# Altium PCB PA_Channel_RF1.PcbDoc (part 1 of 2)
Units mm, origin at the board's own origin, x right, y up, seen from the top; angles counter-clockwise.
Board outline 79.99 x 29.49 mm, 2 copper layers (Top Layer, Bottom Layer), stack 1.071 mm thick; 66 components, 88 nets, 184 pads, 409 vias.
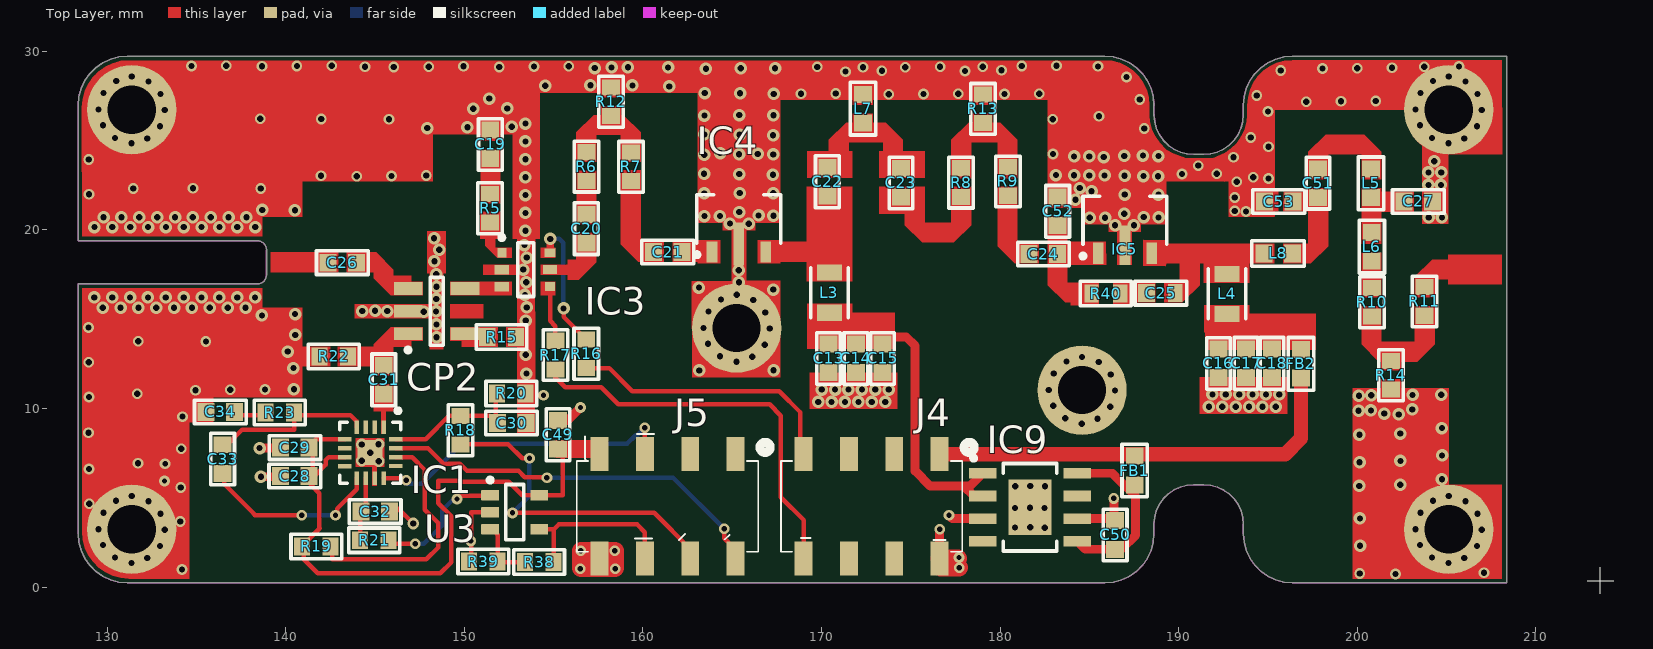
[diagram p0: Top Layer view]
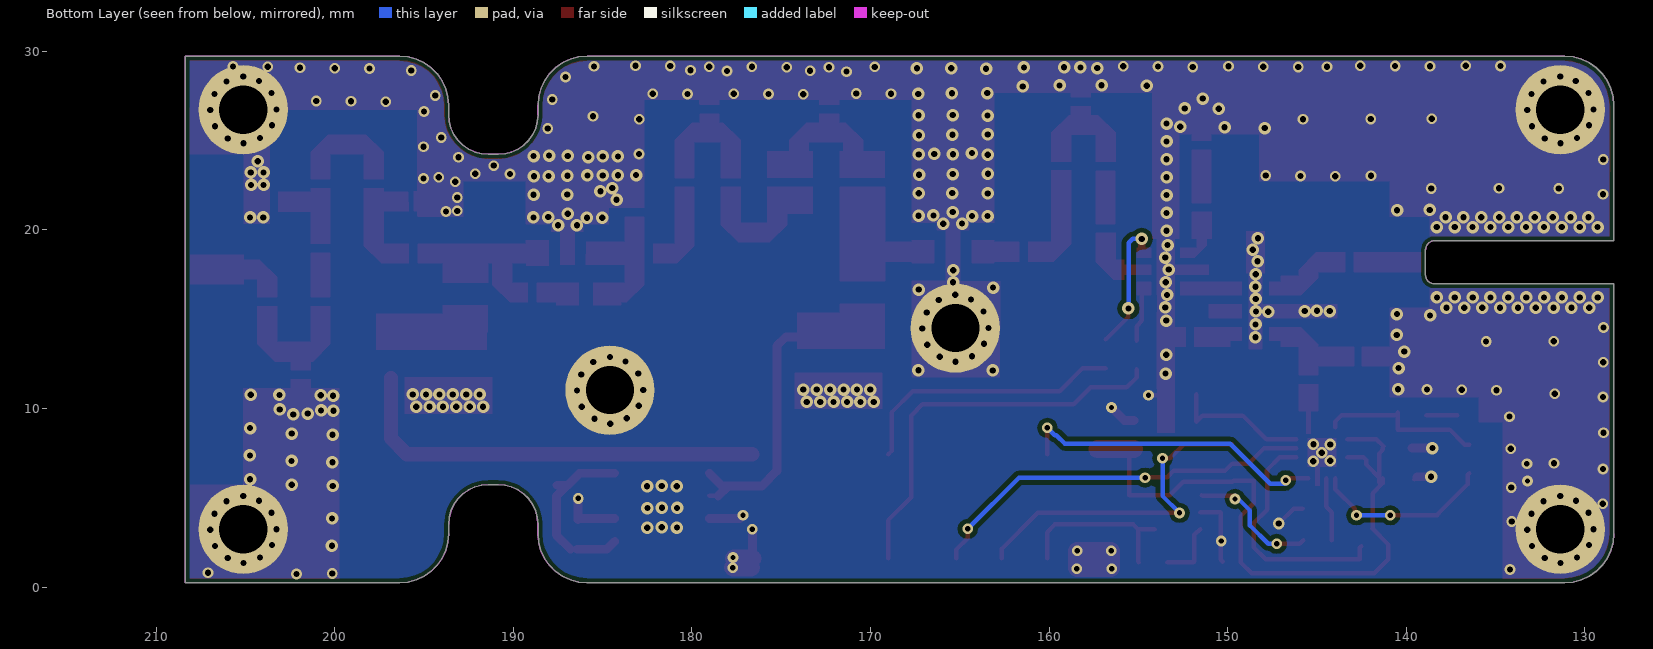
[diagram p1: Bottom Layer view, seen from below]
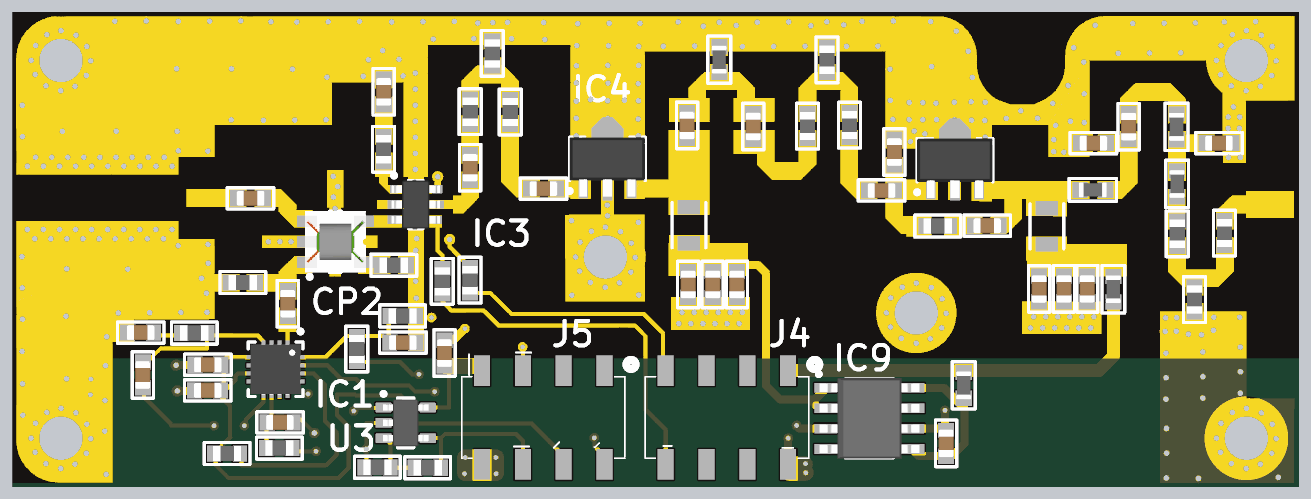
[diagram p3: 3D render of the assembled board from above, using the file's embedded part models]

## Layer stack, top to bottom
Top Solder: solder mask 0.0102, Solder Resist, Dk 3.5
Top Layer: signal copper 0.0356
Dielectric1: core 1, FR-4, Dk 4.8
Bottom Layer: signal copper 0.0356
Bottom Solder: solder mask 0.0102, Solder Resist, Dk 3.5

## Board outline
364 vertices, not listed, extent 128.38,0.235 208.37,29.725

## Design rules (kind name [scope] priority, off if disabled: settings)
Clearance Clearance_1 [InNamedPolygon('L3-No Net')] p1: gap=0.254
Clearance [All] p2: gap=0.152
HoleSize [All] p1: absolutevalues=TRUE maxlimit=5 minlimit=0.2 maxpercent=80.000 minpercent=20.000
HoleToHoleClearance [All] p1: gap=0.2 allowstackedmicrovias=TRUE
MinimumSolderMaskSliver [All] p1: minsoldermaskwidth=0
PolygonConnect [All] p1: connectstyle=Direct reliefconductorwidth=0.254 reliefentries=4 polygonreliefangle="90 Angle" airgapwidth=0.254
RoutingVias [All] p1: holewidth=0.711 width=1.27 viastyle="Through Hole" minholewidth=0.2 minwidth=0.5 maxholewidth=0.711 maxwidth=1.27
SilkToSolderMaskClearance [IsPad] p1: minsilkscreentomaskgap=0 clearancetoexposedcopper=TRUE
SolderMaskExpansion [All] p1: expansion=0.102
Width [All] p1: maxlimit=2 minlimit=0.152 preferedwidth=0.254
26 further rules are at their usual default settings.

## Classes and differential pairs
component class U_Power_Stage: C16 C23 C24 C34 IC3 IC4 R15 R16 R18
component class U_Preamp_protection: C13 C14 C15 C16 C17 C18 C19 C20 C21 C22 C23 C24 C25 C26 C27 C28 C29 C31 C32 C33 C34 C49 C50 C51 C52 C53 CP2 FB1 FB2 IC1 IC3 IC4 IC5 J4 L3 L4 L5 L6 L7 L8 R5 R6 R7 R8 R9 R10 R11 R12 R13 R14 R15 R16 R17 R18 R19 R21 R22 R23 R38 R39 R40 U3

## Components (designator, comment, footprint, x,y, rotation, side; value= is the part's Value field where it differs from the comment)
C13 "4.7u" 0603C#1 170.4,12.8 r270 top
C14 "1n" 0603C#1 171.925,12.8 r270 top
C15 "10n" 0603C#1 173.425,12.8 r270 top
C16 "4.7u" 0603C#1 192.233,12.521 r270 top
C17 "1n" 0603C#1 193.775,12.525 r270 top
C18 "10n" 0603C#1 195.225,12.525 r270 top
C19 "680p" 0603C#1 151.457,24.784 r90 top
C20 "680p" 0603C#1 156.833,20.065 r90 top
C21 "680p" 0603C#1 161.392,18.757 r0 top
C22 "56p" 0603C#1 170.33,22.694 r90 top
C23 "220p" 0603C#1 174.448,22.628 r270 top
C24 "680p" 0603C#1 182.43,18.648 r0 top
C25 "10n" 0603C#2 189.005,16.456 r0 top
C26 "680p" 0603C#1 143.168,18.16 r0 top
C27 "5.6p" 0603C#1 203.422,21.589 r180 top
C28 "100n" 0603C#1 140.508,6.209 r180 top
C29 "100p" 0603C#1 140.516,7.804 r180 top
C30 "100n" 0603C#1 152.647,9.184 r180 top
C31 "470n" 0603C#1 145.488,11.602 r270 top
C32 "100n" 0603C#1 145.005,4.22 r180 top
C33 "100n" 0603C#1 136.468,7.167 r90 top
C34 "100n" 0603C#1 136.339,9.804 r180 top
C49 "100n" 0603C#1 155.242,8.529 r270 top
C50 "4.7u" 0603C#1 186.448,2.913 r90 top
C51 "1nF" 0603C#1 197.799,22.615 r270 top
C52 "1p" 0603C#1 183.228,21.036 r270 top
C53 "6.8pF" 0603C#1 195.607,21.588 r0 top
CP2 "20dB" XFMR_MINI-CIRCUITS_AT224 148.45,15.45 r90 top
FB1 "100R/1A" 0603L 187.541,6.524 r90 top
FB2 "100R/1A" 0603L 196.85,12.5 r270 top
IC1 "HMC7832" QFN50P300X300X80_HS-17N 144.73,7.521 r270 top
IC3 "BBWA5673" SOT95P280X130-6N 153.45,17.77 r0 top
IC4 "MMA3128" SOT89-150P410X170-3N#1 165.375,20.61 r90 top
IC5 "MMA1H22" SOT89-150P410X170-3N#2 186.995,20.534 r90 top
IC9 "ADP7102ARDZ-5.0-R7" SOIC127P600X175-9N-R241X309 181.674,4.465 r0 top
J4 "ZL264-8DG" ZL264-8DG 172.81,4.52 r180 top
J5 "ZL264-8DG" ZL264-8DG 161.38,4.52 r180 top
L3 "1uH" INDP2520X18L 170.449,16.483 r90 top
L4 "1uH" INDP2520X18L 192.718,16.413 r90 top
L5 "33nH" 0603L 200.781,22.605 r270 top
L6 "33nH" 0603L 200.817,19.056 r270 top
L7 "330nH" 0603L 172.334,26.783 r90 top
L8 "18nH" 0603L 195.571,18.684 r0 top
R5 "49R9" 0603R#1 151.449,21.208 r270 top
R6 "8.06" 0603R#1 156.833,23.545 r270 top
R7 "8.06" 0603R#1 159.325,23.525 r90 top
R8 "24" 0603R#1 177.822,22.65 r270 top
R9 "24" 0603R#1 180.439,22.709 r90 top
R10 "8.06" 0603R#1 200.825,15.951 r90 top
R11 "8.06" 0603R#1 203.761,15.99 r270 top
R12 "147R" 0603R#1 158.208,27.171 r270 top
R13 "36.5" 0603R#1 179.038,26.775 r90 top
R14 "140" 0603R#1 201.893,11.858 r270 top
R15 "49R9" 0603R#1 152.084,13.994 r0 top
R16 "100R" 0603R#1 156.829,13.063 r270 top
R17 "100R" 0603R#1 155.102,12.992 r270 top
R18 "4k7" 0603R#1 149.783,8.782 r90 top
R19 "10k" 0603R#1 141.715,2.278 r0 top
R20 "10k" 0603R#1 152.635,10.842 r180 top
R21 "4k7" 0603R#1 144.962,2.617 r180 top
R22 "24.9" 0603R#1 142.688,12.916 r180 top
R23 "4R02" 0603R#1 139.67,9.772 r180 top
R38 "10k" 0603R#1 154.192,1.396 r180 top
R39 "10k" 0603R#1 151.068,1.421 r180 top
R40 "470" 0603R#2 185.924,16.431 r180 top
U3 "LMV321M5X" DBV0005A_N 152.82,4.19 r0 top

## Footprints (in the part's own frame and the unit in brackets; to place one, negate y for a bottom-side part, rotate by r counter-clockwise, add the part's x,y. Pads: shape width x height; smd on the part's side, far side on the other; paste and mask are expansions set on the pad)
0603C#1 [mm]
  rect 0.95x1 smd: 1(-0.8,0) 2(0.8,0)
  silkscreen extent -1.45,-0.66 1.45,0.66, body extent -0.87,-0.47 0.88,0.48, height 0.87
0603C#2 [mm]
  rect 0.95x1 smd: 1(-0.8,0)
  rect 0.8x1 smd: 2(0.8,0)
  silkscreen extent -1.45,-0.66 1.45,0.66, body extent -0.87,-0.47 0.88,0.48, height 0.87
0603L [mm]
  rect 0.95x1 smd: 1(-0.8,0) 2(0.8,0)
  silkscreen extent -1.47,-0.71 1.47,0.71, body extent -0.87,-0.47 0.88,0.48, height 0.7
0603R#1 [mm]
  rect 0.9x1 smd: 1(-0.8,0) 2(0.8,0)
  silkscreen extent -1.42,-0.69 1.42,0.69, body extent -0.87,-0.47 0.88,0.48, height 0.55
0603R#2 [mm]
  rect 0.8x1 smd: 1(-0.8,0) 2(0.8,0)
  silkscreen extent -1.42,-0.69 1.42,0.69, body extent -0.87,-0.47 0.88,0.48, height 0.55
DBV0005A_N [mm] "SOT23, 5-Leads, Body 3.05x1.75mm, Pitch 0.95mm, IPC Medium Density"
  rrect17% 1x0.6 smd: 1(-1.375,0.95) 2(-1.375,0) 3(-1.375,-0.95) 4(1.375,-0.95) 5(1.375,0.95)
  silkscreen extent -1.5,-1.55 0.5,1.92, body extent -1.42,-1.46 1.42,1.46, height 1.08
INDP2520X18L [mm] "Precision Wire Wound Inductor, 2-Leads, Body 2.5x2.0mm, IPC High Density"
  rect 0.9x1.4 smd: 1(-1.125,0) 2(1.125,0)
  silkscreen extent -1.4,-1.05 1.4,1.05, body extent -1.35,-1.05 1.35,1.05, height 1.8
QFN50P300X300X80_HS-17N [mm] "QFN, 16-Leads, Body 3.00x3.00mm, Pitch 0.50mm, Thermal Pad 1.60x1.60mm, IPC Medium Density"
  rect 0.75x0.25 smd: 1(-1.425,0.75) 3(-1.425,-0.25) 10(1.425,-0.25) 12(1.425,0.75)
  rect 0.75x0.24 smd: 2(-1.425,0.25) 4(-1.425,-0.75) 9(1.425,-0.75) 11(1.425,0.25)
  rect 0.25x0.75 smd: 5(-0.75,-1.425) 6(-0.25,-1.425) 7(0.25,-1.425) 8(0.75,-1.425) 14(0.25,1.425) 15(-0.25,1.425) 16(-0.75,1.425)
  rect 0.24x0.75 smd: 13(0.75,1.425)
  rect 1.4x1.4 smd: 17(0,0)
  silkscreen extent -2.47,-1.7 1.7,1.7, body extent -1.58,-1.58 1.58,1.58, height 0.8
SOIC127P600X175-9N-R241X309 [mm] "SOIC 8, Pitch 1.27mm - Body 3.9x4.9mm, (w/thermal tab 2.41mm X 3.098mm), IPC Medium Density"
  rect 1.55x0.6 smd: 1(-2.65,1.905) 2(-2.65,0.635) 3(-2.65,-0.635) 4(-2.65,-1.905) 5(2.65,-1.905) 6(2.65,-0.635) 7(2.65,0.635) 8(2.65,1.905)
  rect 2.41x3.098 smd: 9(0,0)
  silkscreen extent -3.27,-2.45 1.5,2.87, body extent -3.1,-2.5 3.1,2.5, height 1.75
SOT89-150P410X170-3N#1 [mm] "SOT89, 3-Leads, Body 4.55x2.55mm, Pitch 1.50mm, Lead Span 4.1mm, IPC Medium Density"
  rect 1.2x0.6 smd: 1(-1.85,1.5) 3(-1.85,-1.5)
  rect 2.4x0.6 smd: 2(-1.4,0)
  Top Layer region: -0.2,0.3 0.5,1 1.9,1 2.6,0.3 2.6,-0.3 1.9,-1 0.5,-1 -0.2,-0.3
  silkscreen extent -2.12,-2.35 1.35,2.47, body extent -2.35,-2.35 1.35,2.35, height 1.7
SOT89-150P410X170-3N#2 [mm] "SOT89, 3-Leads, Body 4.55x2.55mm, Pitch 1.50mm, Lead Span 4.1mm, IPC Medium Density"
  rect 1.2x0.6 smd: 1(-1.85,1.5) 3(-1.85,-1.5)
  rect 2.2x0.6 smd: 2(-1.4,0)
  Top Layer region: -0.2,0.3 0.5,1 1.9,1 2.6,0.3 2.6,-0.3 1.9,-1 0.5,-1 -0.2,-0.3
  silkscreen extent -2.12,-2.35 1.35,2.47, body extent -2.35,-2.35 1.35,2.35, height 1.7
SOT95P280X130-6N [mm] "SOT23, 6-Leads, Body 2.90x2.80mm, Pitch 0.95mm, IPC Medium Density"
  rect 0.5x0.52 smd: 1(-1.35,0.95)
  rect 0.8x0.55 smd: 2(-1.35,0)
  rect 0.8x0.54 smd: 3(-1.35,-0.95)
  rect 0.55x0.5 smd: 4(1.35,-0.95)
  rect 0.8x0.5 smd: 5(1.35,0)
  rect 0.6x0.5 smd: 6(1.35,0.95)
  silkscreen extent -1.47,-1.5 0.45,1.92, body extent -1.5,-1.5 1.5,1.5, height 1.3
XFMR_MINI-CIRCUITS_AT224 [mil] "MINI-CIRCUITS RF Transformer, Case AT224 - Body 3.81X3.81mm"
  rect 28x63 smd: 1(-50,62.6) 2(0,62.6) 3(50,62.6) 4(50,-62.6) 6(-50,-62.6)
  silkscreen extent -91,-14 75,68, body extent -75,-75 75,75, height 150
ZL264-8DG [mm]
  rect 1x1.9 smd: 1(-3.81,-2.921) 2(-3.81,2.921) 3(-1.27,-2.921) 4(-1.27,2.921) 5(1.27,-2.921) 6(1.27,2.921) 7(3.81,-2.921) 8(3.81,2.921)
  silkscreen extent -5.74,-3.59 5.08,2.54, body extent -5.08,-3.56 5.08,3.56, height 7.5

## Part data
C13 C14 C15 C16 C17 C18 C19 C20 C21 C22 C23 C24 C25 C26 C27 C28 C29 C30 C31 C32 C33 C34 C49 C50 C51 C52 C53: library part CAP_SMD_0603, "Capacitor SMD"
CP2: "50 Ohms directional coupler"
FB1 FB2: library part L_FERRITE_BEAD_0603, "ferrite bead 100R@100MHz 1A"
IC1: library part ADL5904, "DC   to 6 GHz  , 45 dB DC  to 6 GHz , 45 dB TruPwr Detector with Envelope Threshold Detection"
IC3: library part RF_HMC544AE
IC4: library part RF_MMG3012N, "Broadband High Linearity Amplifier"
IC5: library part RF_MMG3H21N, "Broadband High Linearity Amplifier"
IC9: "300 mA, Low Noise, CMOS LDO Linear Regulator"
J4 J5: library part "CON_2X4 2.54 SMT FEM", "2.54mm pitch connector"
L3 L4: "100uH, 60mA, 21R"
L5 L6 L7 L8: library part L_0603_1uH, "1uH, 25mA, 0.6R"
R5 R6 R7 R8 R9 R10 R11 R12 R13 R14 R15 R16 R17 R18 R19 R20 R21 R22 R23 R38 R39 R40: library part RES_0603, "SMD Resistor"
U3: library part CMP-0055-01048-3, "General Purpose, Low Voltage, Rail-to-Rail Output Operational Amplifiers, 5-pin SOT-23"

## Free pads (board coordinates)
  round 5 hole 2.7 unplated: 6(131.376,3.23) 6(131.378,26.73) 6(165.25,14.5) 6(205.125,3.23) 6(205.125,26.73) 8(184.591,11.025)

## Via types
v1: diameter 0.7, hole 0.35, Top Layer to Bottom Layer, tented both sides, 286 vias
v2: diameter 0.6, hole 0.35, Top Layer to Bottom Layer, tented both sides, 93 vias
v3: diameter 0.6, hole 0.3, Top Layer to Bottom Layer, tented both sides, 24 vias
v4: diameter 0.65, hole 0.35, Top Layer to Bottom Layer, tented both sides, 6 vias

## Nets (pads, with @x,y where several pads share a name; then routed paths per layer and width w, separated by ;. In a path a pad name is that pad's centre, name@x,y a point inside that pad or via, vN(x,y) a via of type N, cw(c..) or ccw(c..) an arc to the next point about the centre after c; other vN are vias at no path point)
ADL_Q: IC1.12 J5.5 | length 17.4
  Top Layer w0.254: IC1.12@145.48,6.096 146.635,6.096 v3(146.745,5.986) ; v3(160.097,8.912) 160.11,8.899 J5.5@160.11,7.441
  Bottom Layer w0.254: v3@146.739,5.788 147.62,5.788 149.849,8.017 159.114,8.017 159.596,8.499 159.684,8.499 v3(160.097,8.912)
ALERT: 
FR_Q: 
FR_RST: 
FR_VREF: 
FRPWR: 
GND: C13.2 C14.2 C15.2 C16.2 C17.2 C18.2 C19.2 C27.1 C28.2 C29.2 C30.1 C32.1 C34.2 C49.1 C50.2 C52.1 C53.1 CP2.2 IC1.11 IC1.17 IC3.2 IC4.2 IC5.2 IC9.3 IC9.6 IC9.9 J4.2 J5.8 L7.2 pad.6 pad.8 R12.1 R13.2 R14.2 R15.2 R20.1 R22.2 R39.2 U3.2 | length 28.9
  Top Layer w0.254: v2(134.219,9.543) 134.497,9.82 ; C28.2@139.41,6.175 C28.2@139.553,6.032 ; C29.2@139.682,7.778 C29.2@139.74,7.836 ; IC1.11@144.98,6.096 144.98,6.826 v4(145.204,7.05) ; C32.1@145.805,4.389 146.311,4.389 v4(147.143,3.557) ; R39.2@150.268,1.421 150.381,1.535 v3@150.381,2.54 ; v3@150.343,2.54 150.392,2.59 150.392,4.19 U3.2@151.445,4.19 U3.2@151.545,4.19 ; C30.1@153.436,9.234 153.436,10.739 v3(154.435,10.739) ; v3@177.649,1.599 v3(177.7,1.65) ; C50.2@186.331,3.83 C50.2@186.375,3.786
  Top Layer w0.5: v1(138.538,7.778) C29.2@139.682,7.778 ; v1(138.615,6.175) C28.2@139.41,6.175 ; C49.1@155.242,9.329 155.783,9.329 v3(156.505,10.051) ; J4.2@176.62,1.599 v3(176.62,3.23) ; v3(177.14,4.023) 177.333,3.83 IC9.3@179.024,3.83 ; IC9.6@184.324,3.83 C50.2@186.331,3.83 ; C50.2@186.375,3.786 v3(186.375,4.961)
  Top Layer w1: 134.497,9.82 C34.2@135.336,9.82 ; J4.2@176.62,1.599 v3@177.649,1.599 ; J4.2@176.681,1.085 v3(177.71,1.085) ; v3@156.526,1.069 v3(156.526,2.033) v3(158.431,2.033) 158.431,1.069 v3@156.526,1.069
  other v1: 131.366,1.349 205.115,1.349 132.248,1.623 205.998,1.623 130.442,1.651 204.191,1.651 132.955,2.296 206.704,2.296 200.163,2.305 129.768,2.357 203.517,2.357 133.229,3.205 206.979,3.205 129.515,3.234 203.265,3.234 180.842,3.328 181.688,3.343 182.503,3.324 200.156,3.842 132.983,4.103 206.732,4.103 129.796,4.164 203.546,4.164 180.833,4.427 182.494,4.423 181.679,4.442 132.309,4.809 206.059,4.809 130.503,4.838 204.252,4.838 131.379,5.09 205.129,5.09 180.851,5.644 182.512,5.64 181.697,5.659 200.121,5.662 202.417,5.729 204.745,6.037 200.13,6.993 202.425,7.06 204.754,7.368 200.123,8.529 202.418,8.596 204.747,8.904 184.582,9.143 185.464,9.418 183.657,9.446 202.334,9.666 201.521,9.711 200.076,9.873 200.77,9.888 203.079,9.942 186.17,10.091 191.696,10.089 192.446,10.089 193.196,10.089 193.946,10.089 194.696,10.089 195.446,10.089 182.983,10.152 169.818,10.361 170.568,10.361 171.318,10.361 172.068,10.361 172.818,10.361 173.568,10.361 200.096,10.716 200.789,10.732 203.102,10.758 204.706,10.76 191.892,10.783 192.642,10.783 193.392,10.783 194.142,10.783 194.892,10.783 195.642,10.783 186.445,11 182.731,11.029 170.014,11.055 170.764,11.055 171.514,11.055 172.264,11.055 173.014,11.055 173.764,11.055 140.463,11.069 186.198,11.898 153.478,11.951 183.012,11.959 163.159,12.129 167.321,12.139 140.429,12.261 185.525,12.604 165.24,12.619 183.718,12.633 166.123,12.893 184.595,12.885 164.316,12.921 153.441,13.001 140.12,13.183 166.829,13.566 163.642,13.627 148.449,13.988 140.536,14.116 167.104,14.475 163.39,14.504 148.442,14.705 153.446,14.919 138.67,15.211 140.523,15.288 166.857,15.373 147.731,15.42 148.421,15.429 163.671,15.434 144.281,15.455 145.69,15.456 145,15.464 129.75,15.639 130.75,15.639 131.75,15.639 132.75,15.639 133.75,15.639 134.75,15.639 135.75,15.639 136.75,15.639 137.75,15.639 153.502,15.655 166.184,16.079 164.377,16.108 148.422,16.13 129.284,16.217 130.284,16.217 131.284,16.217 132.284,16.217 133.284,16.217 134.284,16.217 135.284,16.217 136.284,16.217 137.284,16.217 138.284,16.217 153.397,16.358 165.254,16.36 167.299,16.66 163.141,16.77 148.446,16.82 153.469,17.07 165.379,17.069 148.429,17.521 165.363,17.737 153.299,17.774 148.327,18.238 153.504,18.447 148.6,18.887 153.367,19.151 148.309,19.525 153.425,19.95 129.289,20.154 130.289,20.154 131.289,20.154 132.289,20.154 133.289,20.154 134.289,20.154 135.289,20.154 136.289,20.154 137.289,20.154 138.289,20.154 187.496,20.252 186.445,20.263 164.876,20.352 165.927,20.342 185.018,20.682 185.881,20.682 129.8,20.71 130.8,20.71 131.8,20.71 132.8,20.71 133.8,20.71 134.8,20.71 135.8,20.71 136.8,20.71 137.8,20.71 188.05,20.716 188.878,20.696 204.014,20.695 204.745,20.698 163.449,20.772 164.312,20.772 167.309,20.785 166.481,20.806 186.96,20.905 153.425,20.95 165.391,20.995 140.514,21.093 138.681,21.115 184.221,21.683 153.425,21.95 188.871,21.96 186.988,21.974 163.443,22.036 165.419,22.064 167.302,22.05 185.128,22.164 184.458,22.342 203.99,22.513 204.69,22.513 153.425,22.95 188.85,23.002 188.029,23.015 184.143,23.052 184.996,23.051 185.85,23.05 186.97,23.036 183.133,23.069 167.281,23.091 165.401,23.126 163.427,23.141 203.988,23.217 204.712,23.215 204.322,23.842 153.425,23.95 185.812,24.078 184.149,24.115 185.002,24.113 186.954,24.138 188.872,24.134 188.003,24.162 163.433,24.203 165.385,24.228 167.303,24.224 166.434,24.252 164.321,24.302 131.368,24.849 205.115,24.849 153.425,24.95 132.251,25.122 205.998,25.122 130.444,25.151 204.191,25.151 167.292,25.292 165.412,25.326 163.438,25.341 147.924,25.698 150.178,25.752 152.658,25.769 132.957,25.796 206.704,25.796 129.77,25.857 203.517,25.857 153.425,25.95 163.444,26.403 165.396,26.429 167.314,26.425 133.232,26.705 206.979,26.705 129.518,26.734 203.265,26.734 150.505,26.776 152.407,26.797 151.391,27.352 132.985,27.603 167.324,27.611 206.732,27.603 165.445,27.645 129.799,27.664 163.471,27.66 203.546,27.664 161.483,28.033 154.536,28.063 157.061,28.092 159.412,28.087 132.312,28.309 206.059,28.309 130.505,28.337 204.252,28.337 131.382,28.59 205.129,28.59 163.53,29.024 167.4,29.045 157.308,29.061 165.483,29.05 158.245,29.092 161.408,29.094 159.161,29.103
  other v2: 202.144,0.728 200.143,0.759 207.105,0.8 134.187,0.981 134.097,3.671 129.002,4.663 134.117,5.578 128.985,6.611 131.723,6.927 134.146,7.745 128.953,8.635 128.984,10.636 131.689,10.823 134.943,11.025 136.891,11.042 138.839,11.059 128.967,12.584 135.529,13.75 131.737,13.765 128.95,14.532 193.769,21.027 193.137,21.063 193.144,21.808 128.981,21.998 131.467,22.32 134.812,22.335 138.604,22.32 193.257,22.692 195.039,22.871 194.181,22.951 143.973,23.005 145.921,23.022 141.972,23.036 147.869,23.039 190.185,23.127 192.133,23.144 191.097,23.598 128.964,23.946 193.079,24.067 182.971,24.245 195.034,24.659 194.034,25.173 188.08,25.677 145.779,26.195 182.954,26.193 138.57,26.216 141.987,26.21 185.548,26.356 195.008,26.633 197.149,27.181 199.097,27.198 201.045,27.215 187.822,27.303 194.379,27.526 173.769,27.594 168.852,27.616 175.717,27.611 180.251,27.611 170.8,27.633 177.665,27.628 182.199,27.628 187.08,28.561 171.341,28.862 178.036,28.893 173.384,28.912 195.719,28.919 180.079,28.943 198.058,29.039 200.006,29.056 201.954,29.073 146.056,29.123 172.332,29.104 174.697,29.111 144.443,29.138 148.004,29.14 151.953,29.126 153.901,29.143 169.769,29.127 176.645,29.128 179.027,29.135 203.753,29.135 134.728,29.172 138.677,29.158 140.625,29.175 149.952,29.157 155.849,29.16 181.21,29.172 185.481,29.155 205.701,29.152 136.676,29.189 142.573,29.192 183.158,29.189
  other v3: 156.486,1.023 158.451,1.023 150.365,2.575 133.21,5.939 133.245,6.91
  other v4: 144.257,7.068 144.73,7.521 144.255,7.982 145.2,7.992
IN_PWR: 
INPWR: J5.6 R38.1 U3.4 | length 9.6
  Top Layer w0.254: U3.4@154.095,3.24 155.02,3.24 ; R38.1@154.992,1.396 155.02,1.424 155.02,3.24 ; J5.6@160.11,1.599 160.11,3.075 159.681,3.504 155.284,3.504 155.02,3.24
NetC2_1: 
NetC9_1: 
NetC9_2: 
NetC10_1: R11.1
NetC10_2: 
NetC13_1: C13.1 C14.1 C15.1 IC9.1 IC9.2 L3.1 | length 14.9
  Top Layer w0.254: C15.1@173.425,13.6 C15.1@173.825,14 ; IC9.2@178.527,5.1 IC9.2@179.024,5.1
  Top Layer w0.5: C15.1@173.825,14 174.75,14 175.25,13.5 175.25,6.5 176.095,5.655 177.972,5.655 ; IC9.2@178.527,5.1 177.972,5.655 ; IC9.1@179.024,6.37 178.309,5.655 177.972,5.655
NetC16_1: C16.1 C17.1 C18.1 FB2.1 L4.1
NetC19_1: C19.1 R5.1
NetC20_2: C20.2 R6.2
NetC21_1: C21.1 R7.1
NetC21_2: C21.2 IC4.1
NetC22_1: C22.1 IC4.3 L3.2
NetC22_2: C22.2 C23.1 L7.1
NetC23_2: C23.2 R8.2
NetC24_1: C24.1 R9.1
NetC24_2: C24.2 C52.2 IC5.1 R40.2
NetC25_1: C25.1 R40.1
NetC25_2: C25.2 IC5.3 L4.2 L8.1
NetC26_1: C26.1
NetC26_2: C26.2 CP2.3
NetC27_2: C27.2 L5.2 L6.1
NetC30_2: C30.2 IC1.16 R18.2 R20.2 | length 7.9
  Top Layer w0.254: IC1.16@146.155,8.271 147.836,8.271 149.147,9.582 R18.2@149.783,9.582 151.428,9.582 151.768,9.242 R20.2@151.768,10.807
NetC31_1: C31.1 CP2.1 R22.1
NetC31_2: C31.2 IC1.1
NetC32_2: C32.2 IC1.10 R21.2 | length 3.6
  Top Layer w0.254: R21.2@144.162,2.617 144.162,4.177 C32.2@144.205,4.22 144.48,4.495 IC1.10@144.48,6.096
NetC33_1: C33.1 IC1.9 | length 10.2
  Top Layer w0.254: C33.1@136.468,6.367 136.552,6.283 136.552,5.765 138.228,4.089 ; 138.201,4.089 138.276,4.015 v3(140.901,4.015) ; v3(142.787,4.011) 142.874,4.098 142.874,4.374 143.98,5.48 IC1.9@143.98,6.096
  Bottom Layer w0.254: v3(140.901,4.015) 140.945,4.059 140.993,4.011 v3(142.787,4.011)
NetC33_2: C33.2 IC1.4 R23.1 | length 9.3
  Top Layer w0.254: C33.2@136.468,7.967 136.724,7.967 137.575,8.818 140.47,8.818 R23.1@140.47,9.772 ; R23.1@140.472,9.629 143.621,9.629 143.98,9.27 IC1.4@143.98,8.946
NetC34_1: C34.1 R23.2 | length 1.7
  Top Layer w0.254: C34.1@137.139,9.617 137.151,9.629 R23.2@138.872,9.629
NetC37_1: 
NetC37_2: 
NetC38_2: 
NetC39_1: 
NetC39_2: 
NetC40_1: 
NetC43_2: 
NetC44_1: 
NetC44_2: 
NetC45_2: 
NetC46_1: 
NetC46_2: 
NetC47_1: 
NetC50_1: C50.1 FB1.1 IC9.5 IC9.8 | length 10.3
  Top Layer w0.254: C50.1@186.448,2.113 C50.1@186.801,2.113
  Top Layer w0.5: IC9.5@184.324,2.56 184.771,2.113 C50.1@186.448,2.113 ; IC9.8@184.324,6.37 186.291,6.37 186.963,5.698 186.971,5.698 ; C50.1@186.801,2.113 187.589,2.901 187.589,5.08 186.971,5.698 ; FB1.1@187.561,5.698 186.971,5.698
NetC51_1: C51.1 L5.1
NetC51_2: C51.2 C53.2 L8.2
NetCP1_1: 
NetCP1_2: 
NetCP1_3: 
NetCP1_4: 
NetCP2_4: CP2.4 IC3.3
NetCP2_6: CP2.6 R15.1
NetIC1_14: IC1.14 R19.2 | length 13.6
  Top Layer w0.254: R19.2@142.515,2.278 142.607,2.186 142.607,1.551 147.87,1.551 148.532,2.213 148.532,3.584 147.793,4.323 147.793,6.351 147.799,6.357 147.799,6.549 147.077,7.271 IC1.14@146.155,7.271
NetIC3_1: IC3.1 R5.2
NetIC3_4: IC3.4 R17.1 | length 3.1
  Top Layer w0.254: IC3.4@154.805,16.803 154.805,14.909 155.102,14.612 R17.1@155.102,13.792
NetIC3_6: IC3.6 R16.1 | length 7.6
  Top Layer w0.254: IC3.6@154.805,18.703 IC3.6@154.813,18.711 ; v1(155.557,15.599) 155.557,15.135 R16.1@156.829,13.863
  Top Layer w0.4: IC3.6@154.813,18.711 v1(154.813,19.495)
  Bottom Layer w0.254: v1(154.813,19.495) 155.322,19.495 155.535,19.282 v1@155.535,15.617 ; v1(155.557,15.599) v1@155.557,15.617
NetIC7_14: 
NetIC8_14: 
NetL6_2: L6.2 R10.2
NetR2_2: 
NetR6_1: R6.1 R7.2 R12.2
NetR8_1: R8.1 R9.2 R13.1
NetR10_1: R10.1 R11.2 R14.1
NetR21_1: R21.1 U3.1 | length 7.4
  Top Layer w0.254: R21.1@145.762,2.617 145.963,2.416 v3(147.248,2.416) ; v3@149.57,5.11 151.415,5.11 U3.1@151.445,5.14
  Bottom Layer w0.254: v3(147.248,2.416) 147.726,2.416 148.755,3.445 148.755,4.289 v3@149.565,5.099
  other v3: 149.589,4.931
NetR25_1: 
NetR34_2: 
NetR36_2: 
NetR38_2: R38.2 R39.1 U3.3 | length 3.5
  Top Layer w0.254: U3.3@151.545,3.24 151.868,2.917 R39.1@151.868,1.421 151.893,1.396 R38.2@153.392,1.396
P3V3: 
P3V3A: 
P5V0A1: C28.1 C29.1 C49.2 IC1.5 IC1.7 J5.7 R19.1 U3.5 | length 37.9
  Top Layer w0.254: C29.1@141.275,7.874 141.672,8.271 IC1.5@143.305,8.271 ; C29.1@141.316,7.804 141.316,7.68 141.503,7.493 C28.1@141.503,6.209 ; C28.1@141.326,5.817 C28.1@141.326,6.096 ; C28.1@141.402,5.74 141.884,5.258 141.884,3.277 ; C28.1@141.453,5.791 141.503,5.842 C28.1@141.503,6.096 ; C28.1@141.478,6.096 142.24,6.858 142.24,7.112 142.399,7.271 IC1.7@143.305,7.271 ; 141.91,3.283 141.007,2.38 141.007,1.551 141.796,0.762 148.662,0.762 149.28,1.38 149.28,3.96 148.541,4.699 148.541,5.947 149.68,5.947 149.734,5.893 152.496,5.893 153.249,5.14 U3.5@154.195,5.14 155.508,5.14 155.508,7.463 C49.2@155.242,7.729 ; J5.7@157.282,7.729 J5.7@157.57,7.441
  Top Layer w1: C49.2@155.242,7.729 J5.7@157.282,7.729
RFA: J4.7 R16.2 | length 15.4
  Top Layer w0.254: R16.2@156.829,12.263 158.108,12.263 159.399,10.973 167.627,10.973 168.825,9.775 168.825,7.616 J4.7@169,7.441
RFB: J4.8 R17.2 | length 22.5
  Top Layer w0.254: R17.2@155.102,12.192 155.102,11.733 155.658,11.177 157.678,11.177 158.62,10.235 167.095,10.235 167.73,9.6 167.73,5.02 169,3.75 J4.8@169,1.599
RFLPWR: 
RST: IC1.15 J5.2 | length 22.2
  Top Layer w0.254: IC1.15@146.155,7.771 147.967,7.771 148.823,6.915 149.739,6.915 150.152,6.502 153.035,6.502 153.391,6.147 v3@154.661,6.147 ; v3(164.557,3.256) 164.557,2.74 165.19,2.107 J5.2@165.19,1.599
  Bottom Layer w0.254: v3(154.625,6.126) 161.687,6.126 v3(164.557,3.256)
SCK: 
SDA: 
VCC_PREAMP: FB1.2 FB2.2 J4.1 | length 24
  Top Layer w0.8: J4.1@176.62,7.441 195.966,7.441 196.85,8.325 FB2.2@196.85,11.7
VCC_PWRAMP: 
VCC_PWRAMPIN: 
VREF: J5.4 R18.1 | length 19
  Top Layer w0.254: R18.1@149.783,7.982 152.465,7.982 153.24,7.207 v3(153.649,7.207) ; v3(152.7,4.15) 160.632,4.15 162.65,2.132 J5.4@162.65,1.599
  Bottom Layer w0.254: v3(152.7,4.15) 153.649,5.099 v3(153.649,7.207)
pads on no net: C20.1 IC1.2 IC1.3 IC1.6 IC1.8 IC1.13 IC3.5 IC9.4 IC9.7 J4.3 J4.4 J4.5 J4.6 J5.1 J5.3

## Polygon pours and split planes (outlines as drawn)
no net on Top Layer "Top Layer-No Net 7" (none, pour order 8): 204.177,2.705 204.096,2.878 204.047,3.062 204.03,3.252 204.047,3.442 204.096,3.626 204.177,3.799 204.286,3.956 204.421,4.091 204.578,4.2 204.751,4.281 204.935,4.33 205.125,4.347 205.315,4.33 205.499,4.281 205.672,4.2 205.829,4.091 205.964,3.956 206.073,3.799 206.154,3.626 206.203,3.442 206.22,3.252 206.203,3.062 206.154,2.878 206.073,2.705 205.964,2.548 205.829,2.413 205.672,2.304 205.499,2.223 205.315,2.174 205.125,2.157 204.935,2.174 204.751,2.223 204.578,2.304 204.421,2.413 204.286,2.548
no net on Top Layer "Top Layer-No Net 7" (none, pour order 9): 204.177,26.205 204.096,26.378 204.047,26.562 204.03,26.752 204.047,26.942 204.096,27.126 204.177,27.299 204.286,27.456 204.421,27.591 204.578,27.7 204.751,27.781 204.935,27.83 205.125,27.847 205.315,27.83 205.499,27.781 205.672,27.7 205.829,27.591 205.964,27.456 206.073,27.299 206.154,27.126 206.203,26.942 206.22,26.752 206.203,26.562 206.154,26.378 206.073,26.205 205.964,26.048 205.829,25.913 205.672,25.804 205.499,25.723 205.315,25.674 205.125,25.657 204.935,25.674 204.751,25.723 204.578,25.804 204.421,25.913 204.286,26.048
no net on Top Layer "Top Layer-No Net 7" (none, pour order 10): 130.43,26.205 130.349,26.378 130.3,26.562 130.283,26.752 130.3,26.942 130.349,27.126 130.43,27.299 130.539,27.456 130.674,27.591 130.831,27.7 131.004,27.781 131.188,27.83 131.378,27.847 131.568,27.83 131.752,27.781 131.925,27.7 132.082,27.591 132.217,27.456 132.326,27.299 132.407,27.126 132.456,26.942 132.473,26.752 132.456,26.562 132.407,26.378 132.326,26.205 132.217,26.048 132.082,25.913 131.925,25.804 131.752,25.723 131.568,25.674 131.378,25.657 131.188,25.674 131.004,25.723 130.831,25.804 130.674,25.913 130.539,26.048
no net on Top Layer "Top Layer-No Net 7" (none, pour order 11): 130.427,2.705 130.347,2.878 130.298,3.062 130.281,3.252 130.298,3.442 130.347,3.626 130.427,3.799 130.537,3.956 130.672,4.091 130.828,4.2 131.001,4.281 131.185,4.33 131.376,4.347 131.566,4.33 131.75,4.281 131.923,4.2 132.079,4.091 132.214,3.956 132.324,3.799 132.404,3.626 132.453,3.442 132.47,3.252 132.453,3.062 132.404,2.878 132.324,2.705 132.214,2.548 132.079,2.413 131.923,2.304 131.75,2.223 131.566,2.174 131.376,2.157 131.185,2.174 131.001,2.223 130.828,2.304 130.672,2.413 130.537,2.548
no net on Top Layer "Top Layer-No Net 7" (none, pour order 7): 164.302,13.975 164.221,14.148 164.172,14.332 164.155,14.522 164.172,14.712 164.221,14.896 164.302,15.069 164.411,15.226 164.546,15.361 164.703,15.47 164.876,15.551 165.06,15.6 165.25,15.617 165.44,15.6 165.624,15.551 165.797,15.47 165.954,15.361 166.089,15.226 166.198,15.069 166.279,14.896 166.328,14.712 166.345,14.522 166.328,14.332 166.279,14.148 166.198,13.975 166.089,13.818 165.954,13.683 165.797,13.574 165.624,13.493 165.44,13.444 165.25,13.427 165.06,13.444 164.876,13.493 164.703,13.574 164.546,13.683 164.411,13.818
GND on Bottom Layer "L3-No Net" (solid, remove dead copper, pour order 12): 128.124,30.036 208.502,30.037 208.502,-0.339 130.228,-0.339 128.624,1.265 128.124,1.765

## Keep-outs
Keep-Out Layer:
  lines w0.01: 128.374,16.982 138.42,16.982 ; 128.374,16.982 138.42,16.982 ; 128.374,16.982 138.42,16.982 ; 128.374,16.982 138.42,16.982 ; 128.374,19.382 138.42,19.382 ; 128.374,19.382 138.42,19.382 ; 128.374,19.382 138.42,19.382 ; 128.374,19.382 138.42,19.382 ; 128.375,2.98 128.417,2.502 ; 128.375,2.98 128.375,16.981 ; 128.375,2.98 128.375,16.981 ; 128.375,2.98 128.417,2.502 ; 128.375,2.98 128.417,2.502 ; 128.375,2.98 128.375,16.981 ; 128.375,2.98 128.375,16.981 ; 128.375,2.98 128.417,2.502 ; 128.375,19.383 128.375,26.98 ; 128.375,19.383 128.375,26.98 ; 128.375,19.383 128.375,26.98 ; 128.375,26.98 128.417,27.458 ; 128.375,26.98 128.417,27.458 ; 128.375,26.98 128.417,27.458 ; 128.375,26.98 128.417,27.458 ; 128.417,2.502 128.541,2.039 ; 128.417,2.502 128.541,2.039 ; 128.417,2.502 128.541,2.039 ; 128.417,2.502 128.541,2.039 ; 128.417,27.458 128.541,27.921 ; 128.417,27.458 128.541,27.921 ; 128.417,27.458 128.541,27.921 ; 128.417,27.458 128.541,27.921 ; 128.541,2.039 128.743,1.605 ; 128.541,2.039 128.743,1.605 ; 128.541,2.039 128.743,1.605 ; 128.541,2.039 128.743,1.605 ; 128.541,27.921 128.743,28.355 ; 128.541,27.921 128.743,28.355 ; 128.541,27.921 128.743,28.355 ; 128.541,27.921 128.743,28.355 ; 128.743,1.605 129.018,1.212 ; 128.743,1.605 129.018,1.212 ; 128.743,1.605 129.018,1.212 ; 128.743,1.605 129.018,1.212 ; 128.743,28.355 129.018,28.748 ; 128.743,28.355 129.018,28.748 ; 128.743,28.355 129.018,28.748 ; 128.743,28.355 129.018,28.748 ; 129.018,1.212 129.357,0.873 ; 129.018,1.212 129.357,0.873 ; 129.018,1.212 129.357,0.873 ; 129.018,1.212 129.357,0.873 ; 129.018,28.748 129.357,29.087 ; 129.018,28.748 129.357,29.087 ; 129.018,28.748 129.357,29.087 ; 129.018,28.748 129.357,29.087 ; 129.357,0.873 129.75,0.598 ; 129.357,0.873 129.75,0.598 ; 129.357,0.873 129.75,0.598 ; 129.357,0.873 129.75,0.598 ; 129.357,29.087 129.75,29.362 ; 129.357,29.087 129.75,29.362 ; 129.357,29.087 129.75,29.362 ; 129.357,29.087 129.75,29.362 ; 129.75,0.598 130.184,0.396 ; 129.75,0.598 130.184,0.396 ; 129.75,0.598 130.184,0.396 ; 129.75,0.598 130.184,0.396 ; 129.75,29.362 130.184,29.564 ; 129.75,29.362 130.184,29.564 ; 129.75,29.362 130.184,29.564 ; 129.75,29.362 130.184,29.564 ; 130.184,0.396 130.647,0.272 ; 130.184,0.396 130.647,0.272 ; 130.184,0.396 130.647,0.272 ; 130.184,0.396 130.647,0.272 ; 130.184,29.564 130.647,29.688 ; 130.184,29.564 130.647,29.688 ; 130.184,29.564 130.647,29.688 ; 130.184,29.564 130.647,29.688 ; 130.647,0.272 131.125,0.23 ; 130.647,0.272 131.125,0.23 ; 130.647,0.272 131.125,0.23 ; 130.647,0.272 131.125,0.23 ; 130.647,29.688 131.125,29.73 ; 130.647,29.688 131.125,29.73 ; 130.647,29.688 131.125,29.73 ; 130.647,29.688 131.125,29.73 ; 131.125,0.23 185.876,0.23 ; 131.125,0.23 185.876,0.23 ; 131.125,0.23 185.876,0.23 ; 131.125,0.23 185.876,0.23 ; 131.125,29.73 185.875,29.73 ; 131.125,29.73 185.875,29.73 ; 131.125,29.73 185.875,29.73 ; 131.125,29.73 185.875,29.73 ; 138.42,16.982 138.507,16.99 ; 138.42,16.982 138.507,16.99 ; 138.42,16.982 138.507,16.99 ; 138.42,16.982 138.507,16.99 ; 138.42,19.382 138.507,19.374 ; 138.42,19.382 138.507,19.374 ; 138.42,19.382 138.507,19.374 ; 138.42,19.382 138.507,19.374 ; 138.507,16.99 138.591,17.012 ; 138.507,16.99 138.591,17.012 ; 138.507,16.99 138.591,17.012 ; 138.507,16.99 138.591,17.012 ; 138.507,19.374 138.591,19.352 ; 138.507,19.374 138.591,19.352 ; 138.507,19.374 138.591,19.352 ; 138.507,19.374 138.591,19.352 ; 138.591,17.012 138.67,17.049 ; 138.591,17.012 138.67,17.049 ; 138.591,17.012 138.67,17.049 ; 138.591,17.012 138.67,17.049 ; 138.591,19.352 138.67,19.315 ; 138.591,19.352 138.67,19.315 ; 138.591,19.352 138.67,19.315 ; 138.591,19.352 138.67,19.315 ; 138.67,17.049 138.741,17.099 ; 138.67,17.049 138.741,17.099 ; 138.67,17.049 138.741,17.099 ; 138.67,17.049 138.741,17.099 ; 138.67,19.315 138.741,19.265 ; 138.67,19.315 138.741,19.265 ; 138.67,19.315 138.741,19.265 ; 138.67,19.315 138.741,19.265 ; 138.741,17.099 138.803,17.161 ; 138.741,17.099 138.803,17.161 ; 138.741,17.099 138.803,17.161 ; 138.741,17.099 138.803,17.161 ; 138.741,19.265 138.803,19.203 ; 138.741,19.265 138.803,19.203 ; 138.741,19.265 138.803,19.203 ; 138.741,19.265 138.803,19.203 ; 138.803,17.161 138.853,17.232 ; 138.803,17.161 138.853,17.232 ; 138.803,17.161 138.853,17.232 ; 138.803,17.161 138.853,17.232 ; 138.803,19.203 138.853,19.132 ; 138.803,19.203 138.853,19.132 ; 138.803,19.203 138.853,19.132 ; 138.803,19.203 138.853,19.132 ; 138.853,17.232 138.89,17.311 ; 138.853,17.232 138.89,17.311 ; 138.853,17.232 138.89,17.311 ; 138.853,17.232 138.89,17.311 ; 138.853,19.132 138.89,19.053 ; 138.853,19.132 138.89,19.053 ; 138.853,19.132 138.89,19.053 ; 138.853,19.132 138.89,19.053 ; 138.89,17.311 138.912,17.395 ; 138.89,17.311 138.912,17.395 ; 138.89,17.311 138.912,17.395 ; 138.89,17.311 138.912,17.395 ; 138.89,19.053 138.912,18.969 ; 138.89,19.053 138.912,18.969 ; 138.89,19.053 138.912,18.969 ; 138.89,19.053 138.912,18.969 ; 138.912,17.395 138.92,17.482 ; 138.912,17.395 138.92,17.482 ; 138.912,17.395 138.92,17.482 ; 138.912,17.395 138.92,17.482 ; 138.912,18.969 138.92,18.882 ; 138.912,18.969 138.92,18.882 ; 138.912,18.969 138.92,18.882 ; 138.912,18.969 138.92,18.882 ; 138.92,17.482 138.92,18.882 ; 138.92,17.482 138.92,18.882 ; 138.92,17.482 138.92,18.882 ; 138.92,17.482 138.92,18.882 ; 185.876,0.23 186.354,0.272 ; 185.876,0.23 186.354,0.272 ; 185.876,0.23 186.354,0.272 ; 185.876,0.23 186.354,0.272 ; 185.875,29.73 186.353,29.688 ; 185.875,29.73 186.353,29.688 ; 185.875,29.73 186.353,29.688 ; 185.875,29.73 186.353,29.688 ; 186.353,29.688 186.816,29.564 ; 186.353,29.688 186.816,29.564 ; 186.353,29.688 186.816,29.564 ; 186.353,29.688 186.816,29.564 ; 186.354,0.272 186.817,0.396 ; 186.354,0.272 186.817,0.396 ; 186.354,0.272 186.817,0.396 ; 186.354,0.272 186.817,0.396 ; 186.817,0.396 187.251,0.598 ; 186.817,0.396 187.251,0.598 ; 186.817,0.396 187.251,0.598 ; 186.817,0.396 187.251,0.598 ; 186.816,29.564 187.25,29.362 ; 186.816,29.564 187.25,29.362 ; 186.816,29.564 187.25,29.362 ; 186.816,29.564 187.25,29.362 ; 187.25,29.362 187.643,29.087 ; 187.25,29.362 187.643,29.087 ; 187.25,29.362 187.643,29.087 ; 187.25,29.362 187.643,29.087 ; 187.251,0.598 187.644,0.873 ; 187.251,0.598 187.644,0.873 ; 187.251,0.598 187.644,0.873 ; 187.251,0.598 187.644,0.873 ; 187.643,29.087 187.982,28.748 ; 187.643,29.087 187.982,28.748 ; 187.643,29.087 187.982,28.748 ; 187.643,29.087 187.982,28.748 ; 187.644,0.873 187.983,1.212 ; 187.644,0.873 187.983,1.212 ; 187.644,0.873 187.983,1.212 ; 187.644,0.873 187.983,1.212 ; 187.983,1.212 188.258,1.605 ; 187.983,1.212 188.258,1.605 ; 187.983,1.212 188.258,1.605 ; 187.983,1.212 188.258,1.605 ; 187.982,28.748 188.257,28.355 ; 187.982,28.748 188.257,28.355 ; 187.982,28.748 188.257,28.355 ; 187.982,28.748 188.257,28.355 ; 188.257,28.355 188.459,27.921 ; 188.257,28.355 188.459,27.921 ; 188.257,28.355 188.459,27.921 ; 188.257,28.355 188.459,27.921 ; 188.258,1.605 188.46,2.039 ; 188.258,1.605 188.46,2.039 ; 188.258,1.605 188.46,2.039 ; 188.258,1.605 188.46,2.039 ; 188.459,27.921 188.583,27.458 ; 188.459,27.921 188.583,27.458 ; 188.459,27.921 188.583,27.458 ; 188.459,27.921 188.583,27.458 ; 188.46,2.039 188.584,2.502 ; 188.46,2.039 188.584,2.502 ; 188.46,2.039 188.584,2.502 ; 188.46,2.039 188.584,2.502 ; 188.583,27.458 188.625,26.98 ; 188.583,27.458 188.625,26.98 ; 188.583,27.458 188.625,26.98 ; 188.583,27.458 188.625,26.98 ; 188.584,2.502 188.626,2.98 ; 188.584,2.502 188.626,2.98 ; 188.584,2.502 188.626,2.98 ; 188.584,2.502 188.626,2.98 ; 188.625,26.455 188.625,26.98 ; 188.625,26.455 188.659,26.069 ; 188.625,26.455 188.659,26.069 ; 188.625,26.455 188.625,26.98 ; 188.625,26.455 188.625,26.98 ; 188.625,26.455 188.659,26.069 ; 188.625,26.455 188.659,26.069 ; 188.625,26.455 188.625,26.98 ; 188.626,2.98 188.626,3.505 ; 188.626,2.98 188.626,3.505 ; 188.626,2.98 188.626,3.505 ; 188.626,2.98 188.626,3.505 ; 188.626,3.505 188.66,3.891 ; 188.626,3.505 188.66,3.891 ; 188.626,3.505 188.66,3.891 ; 188.626,3.505 188.66,3.891 ; 188.659,26.069 188.759,25.694 ; 188.659,26.069 188.759,25.694 ; 188.659,26.069 188.759,25.694 ; 188.659,26.069 188.759,25.694 ; 188.66,3.891 188.76,4.266 ; 188.66,3.891 188.76,4.266 ; 188.66,3.891 188.76,4.266 ; 188.66,3.891 188.76,4.266 ; 188.759,25.694 188.923,25.343 ; 188.759,25.694 188.923,25.343 ; 188.759,25.694 188.923,25.343 ; 188.759,25.694 188.923,25.343 ; 188.76,4.266 188.924,4.617 ; 188.76,4.266 188.924,4.617 ; 188.76,4.266 188.924,4.617 ; 188.76,4.266 188.924,4.617 ; 188.924,4.617 189.147,4.935 ; 188.924,4.617 189.147,4.935 ; 188.924,4.617 189.147,4.935 ; 188.924,4.617 189.147,4.935 ; 188.923,25.343 189.146,25.025 ; 188.923,25.343 189.146,25.025 ; 188.923,25.343 189.146,25.025 ; 188.923,25.343 189.146,25.025 ; 189.146,25.025 189.42,24.751 ; 189.146,25.025 189.42,24.751 ; 189.146,25.025 189.42,24.751 ; 189.146,25.025 189.42,24.751 ; 189.147,4.935 189.421,5.209 ; 189.147,4.935 189.421,5.209 ; 189.147,4.935 189.421,5.209 ; 189.147,4.935 189.421,5.209 ; 189.42,24.751 189.738,24.528 ; 189.42,24.751 189.738,24.528 ; 189.42,24.751 189.738,24.528 ; 189.42,24.751 189.738,24.528 ; 189.421,5.209 189.738,5.432 ; 189.421,5.209 189.738,5.432 ; 189.421,5.209 189.738,5.432 ; 189.421,5.209 189.738,5.432 ; 189.738,5.432 190.09,5.596 ; 189.738,5.432 190.09,5.596 ; 189.738,5.432 190.09,5.596 ; 189.738,5.432 190.09,5.596 ; 189.738,24.528 190.089,24.364 ; 189.738,24.528 190.089,24.364 ; 189.738,24.528 190.089,24.364 ; 189.738,24.528 190.089,24.364 ; 190.089,24.364 190.464,24.264 ; 190.089,24.364 190.464,24.264 ; 190.089,24.364 190.464,24.264 ; 190.089,24.364 190.464,24.264 ; 190.09,5.596 190.465,5.696 ; 190.09,5.596 190.465,5.696 ; 190.09,5.596 190.465,5.696 ; 190.09,5.596 190.465,5.696 ; 190.464,24.264 190.839,24.231 ; 190.464,24.264 190.839,24.231 ; 190.464,24.264 190.839,24.231 ; 190.464,24.264 190.839,24.231 ; 190.465,5.696 190.84,5.729 ; 190.465,5.696 190.84,5.729 ; 190.465,5.696 190.84,5.729 ; 190.465,5.696 190.84,5.729 ; 190.839,24.231 191.411,24.231 ; 190.839,24.231 191.411,24.231 ; 190.839,24.231 191.411,24.231 ; 190.839,24.231 191.411,24.231 ; 190.84,5.729 191.412,5.729 ; 190.84,5.729 191.412,5.729 ; 190.84,5.729 191.412,5.729 ; 190.84,5.729 191.412,5.729 ; 191.412,5.729 191.787,5.696 ; 191.412,5.729 191.787,5.696 ; 191.412,5.729 191.787,5.696 ; 191.412,5.729 191.787,5.696 ; 191.411,24.231 191.786,24.264 ; 191.411,24.231 191.786,24.264 ; 191.411,24.231 191.786,24.264 ; 191.411,24.231 191.786,24.264 ; 191.786,24.264 192.161,24.364 ; 191.786,24.264 192.161,24.364 ; 191.786,24.264 192.161,24.364 ; 191.786,24.264 192.161,24.364 ; 191.787,5.696 192.162,5.596 ; 191.787,5.696 192.162,5.596 ; 191.787,5.696 192.162,5.596 ; 191.787,5.696 192.162,5.596 ; 192.161,24.364 192.513,24.528 ; 192.161,24.364 192.513,24.528 ; 192.161,24.364 192.513,24.528 ; 192.161,24.364 192.513,24.528 ; 192.162,5.596 192.513,5.432 ; 192.162,5.596 192.513,5.432 ; 192.162,5.596 192.513,5.432 ; 192.162,5.596 192.513,5.432 ; 192.513,5.432 192.831,5.209 ; 192.513,5.432 192.831,5.209 ; 192.513,5.432 192.831,5.209 ; 192.513,5.432 192.831,5.209 ; 192.513,24.528 192.83,24.751 ; 192.513,24.528 192.83,24.751 ; 192.513,24.528 192.83,24.751 ; 192.513,24.528 192.83,24.751 ; 192.83,24.751 193.104,25.025 ; 192.83,24.751 193.104,25.025 ; 192.83,24.751 193.104,25.025 ; 192.83,24.751 193.104,25.025 ; 192.831,5.209 193.105,4.935 ; 192.831,5.209 193.105,4.935 ; 192.831,5.209 193.105,4.935 ; 192.831,5.209 193.105,4.935 ; 193.104,25.025 193.327,25.343 ; 193.104,25.025 193.327,25.343 ; 193.104,25.025 193.327,25.343 ; 193.104,25.025 193.327,25.343 ; 193.105,4.935 193.328,4.617 ; 193.105,4.935 193.328,4.617 ; 193.105,4.935 193.328,4.617 ; 193.105,4.935 193.328,4.617 ; 193.327,25.343 193.491,25.694 ; 193.327,25.343 193.491,25.694 ; 193.327,25.343 193.491,25.694 ; 193.327,25.343 193.491,25.694 ; 193.328,4.617 193.492,4.266 ; 193.328,4.617 193.492,4.266 ; 193.328,4.617 193.492,4.266 ; 193.328,4.617 193.492,4.266 ; 193.491,25.694 193.591,26.069 ; 193.491,25.694 193.591,26.069 ; 193.491,25.694 193.591,26.069 ; 193.491,25.694 193.591,26.069 ; 193.492,4.266 193.592,3.891 ; 193.492,4.266 193.592,3.891 ; 193.492,4.266 193.592,3.891 ; 193.492,4.266 193.592,3.891 ; 193.591,26.069 193.625,26.455 ; 193.591,26.069 193.625,26.455 ; 193.591,26.069 193.625,26.455 ; 193.591,26.069 193.625,26.455 ; 193.592,3.891 193.626,3.505 ; 193.592,3.891 193.626,3.505 ; 193.592,3.891 193.626,3.505 ; 193.592,3.891 193.626,3.505 ; 193.625,26.455 193.625,26.98 ; 193.625,26.455 193.625,26.98 ; 193.625,26.455 193.625,26.98 ; 193.625,26.455 193.625,26.98 ; 193.625,26.98 193.667,27.458 ; 193.625,26.98 193.667,27.458 ; 193.625,26.98 193.667,27.458 ; 193.625,26.98 193.667,27.458 ; 193.626,2.98 193.668,2.502 ; 193.626,2.98 193.626,3.505 ; 193.626,2.98 193.626,3.505 ; 193.626,2.98 193.668,2.502 ; 193.626,2.98 193.668,2.502 ; 193.626,2.98 193.626,3.505 ; 193.626,2.98 193.626,3.505 ; 193.626,2.98 193.668,2.502 ; 193.667,27.458 193.791,27.921 ; 193.667,27.458 193.791,27.921 ; 193.667,27.458 193.791,27.921 ; 193.667,27.458 193.791,27.921 ; 193.668,2.502 193.792,2.039 ; 193.668,2.502 193.792,2.039 ; 193.668,2.502 193.792,2.039 ; 193.668,2.502 193.792,2.039 ; 193.792,2.039 193.994,1.605 ; 193.792,2.039 193.994,1.605 ; 193.792,2.039 193.994,1.605 ; 193.792,2.039 193.994,1.605 ; 193.791,27.921 193.993,28.355 ; 193.791,27.921 193.993,28.355 ; 193.791,27.921 193.993,28.355 ; 193.791,27.921 193.993,28.355 ; 193.993,28.355 194.268,28.748 ; 193.993,28.355 194.268,28.748 ; 193.993,28.355 194.268,28.748 ; 193.993,28.355 194.268,28.748 ; 193.994,1.605 194.269,1.212 ; 193.994,1.605 194.269,1.212 ; 193.994,1.605 194.269,1.212 ; 193.994,1.605 194.269,1.212 ; 194.268,28.748 194.607,29.087 ; 194.268,28.748 194.607,29.087 ; 194.268,28.748 194.607,29.087 ; 194.268,28.748 194.607,29.087 ; 194.269,1.212 194.608,0.873 ; 194.269,1.212 194.608,0.873 ; 194.269,1.212 194.608,0.873 ; 194.269,1.212 194.608,0.873 ; 194.607,29.087 195,29.362 ; 194.607,29.087 195,29.362 ; 194.607,29.087 195,29.362 ; 194.607,29.087 195,29.362 ; 194.608,0.873 195.001,0.598 ; 194.608,0.873 195.001,0.598 ; 194.608,0.873 195.001,0.598 ; 194.608,0.873 195.001,0.598 ; 195.001,0.598 195.435,0.396 ; 195.001,0.598 195.435,0.396 ; 195.001,0.598 195.435,0.396 ; 195.001,0.598 195.435,0.396 ; 195,29.362 195.434,29.564 ; 195,29.362 195.434,29.564 ; 195,29.362 195.434,29.564 ; 195,29.362 195.434,29.564 ; 195.434,29.564 195.897,29.688 ; 195.434,29.564 195.897,29.688 ; 195.434,29.564 195.897,29.688 ; 195.434,29.564 195.897,29.688 ; 195.435,0.396 195.898,0.272 ; 195.435,0.396 195.898,0.272 ; 195.435,0.396 195.898,0.272 ; 195.435,0.396 195.898,0.272 ; 195.897,29.688 196.375,29.73 ; 195.897,29.688 196.375,29.73 ; 195.897,29.688 196.375,29.73 ; 195.897,29.688 196.375,29.73 ; 195.898,0.272 196.376,0.23 ; 195.898,0.272 196.376,0.23 ; 195.898,0.272 196.376,0.23 ; 195.898,0.272 196.376,0.23 ; 196.375,29.73 208.375,29.73 ; 196.375,29.73 208.375,29.73 ; 196.375,29.73 208.375,29.73 ; 196.375,29.73 208.375,29.73 ; 196.376,0.23 208.375,0.23 ; 196.376,0.23 208.375,0.23 ; 196.376,0.23 208.375,0.23 ; 196.376,0.23 208.375,0.23 ; 208.375,0.23 208.375,29.73 ; 208.375,0.23 208.375,29.73 ; 208.375,0.23 208.375,29.73 ; 208.375,0.23 208.375,29.73